# Altium PCB Fan_control.PcbDoc (part 1 of 2)
Units mm, origin at the board's own origin, x right, y up, seen from the top; angles counter-clockwise.
Board outline 271 x 20 mm, 2 copper layers (Top Layer, Bottom Layer), stack 1.571 mm thick; 115 components, 80 nets, 358 pads, 372 vias.
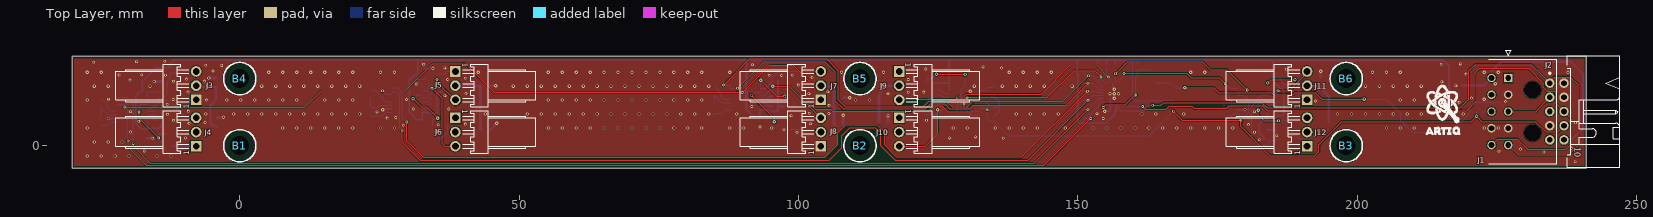
[diagram p0: Top Layer view]
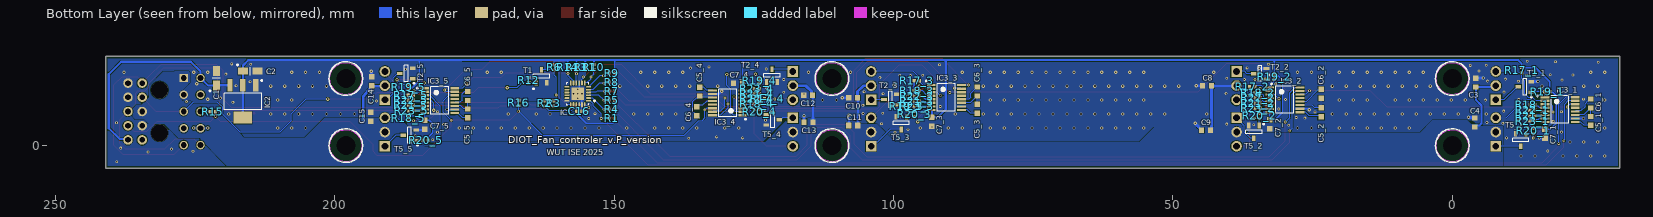
[diagram p1: Bottom Layer view, seen from below]
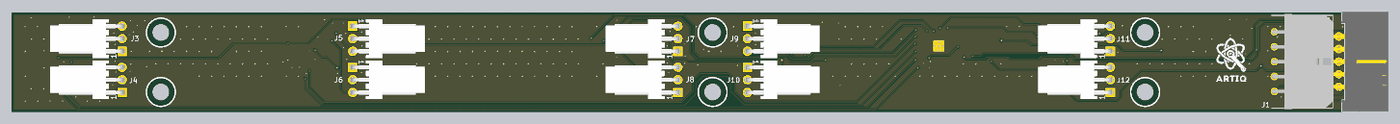
[diagram p3: 3D render of the assembled board from above, using the file's embedded part models]
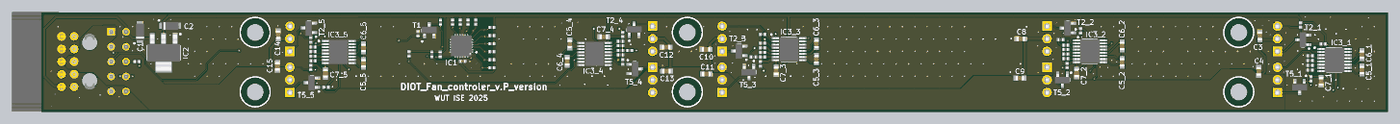
[diagram p4: 3D render of the assembled board from below, using the file's embedded part models]

## Layer stack, top to bottom
Top Solder: solder mask 0.0102, Solder Resist, Dk 3.5
Top Layer: signal copper 0.0356
Dielectric 1: dielectric 1.5, FR-4, Dk 4.8
Bottom Layer: signal copper 0.0356
Bottom Solder: solder mask 0.0102, Solder Resist, Dk 3.5

## Board outline
-30,-4 241,-4 241,16 -30,16

## Design rules (kind name [scope] priority, off if disabled: settings)
BoardOutlineClearance [OnLayer('Top Layer')] p1: gap=0.4 ignorepadtopadclearanceinfootprint=FALSE except(0.1: Text-OutlineEdge Text-CavityEdge Text-CutoutEdge Text-SplitBarrior Text-SplitContinuation)
BoardOutlineClearance BoardOutlineClearance_2 [OnLayer('Multi-Layer')] p2: gap=0.35 ignorepadtopadclearanceinfootprint=FALSE
BoardOutlineClearance BoardOutlineClearance_1 [OnLayer('Bottom Layer')] p3: gap=0.4 ignorepadtopadclearanceinfootprint=FALSE except(0.1: Text-OutlineEdge Text-CavityEdge Text-CutoutEdge Text-SplitBarrior Text-SplitContinuation)
Clearance [All] p1: gap=0.152 ignorepadtopadclearanceinfootprint=TRUE
ComponentClearance ComponentClearance_1 [IsFree or InComponent('J1') vs InComponent('J*')] p1: gap=-1 collisioncheckmode=3 verticalgap=-1 showdistances=TRUE
ComponentClearance [All] p2: gap=0 collisioncheckmode=3 verticalgap=0.254 showdistances=TRUE
HoleSize [All] p1: absolutevalues=TRUE maxlimit=3.4 minlimit=0.025 maxpercent=80.000 minpercent=20.000
MinimumSolderMaskSliver [All] p1: minsoldermaskwidth=0.025
PlaneClearance [All] p1: clearance=0.381
PlaneConnect [InNet('GND')] p1: planeconnectstyle=Relief reliefexpansion=0.508 reliefentries=4 reliefconductorwidth=0.254 reliefairgap=0.254
PolygonConnect [All] p1: connectstyle=Direct reliefconductorwidth=0.254 reliefentries=4 polygonreliefangle="90 Angle" airgapwidth=0.152
RoutingVias [All] p1: holewidth=0.25 width=0.6 viastyle="Through Hole" minholewidth=0.2 minwidth=0.5 maxholewidth=0.7 maxwidth=1.27
SilkToSilkClearance [All] p1: silktosilkclearance=0.076
SilkToSolderMaskClearance [All] p1: minsilkscreentomaskgap=0.025 clearancetoexposedcopper=TRUE
SolderMaskExpansion SolderMaskExpansion_Via [IsVia] p1: expansion=0.015 istentingtop=TRUE
SolderMaskExpansion [All] p2: expansion=0.015 istentingtop=FALSE
SupplyNets "Schematic Supply Nets_3" [InNet('P12V0')] p1: voltage=0.000
SupplyNets "Schematic Supply Nets_2" [InNet('P3V3')] p2: voltage=0.000
SupplyNets "Schematic Supply Nets_1" [InNet('GND')] p3: voltage=0.000
SupplyNets "Schematic Supply Nets" [InNet('P5V0')] p4: voltage=0.000
UnRoutedNet [All] p1: checkbadconnections=TRUE
Width [All] p1: maxlimit=0.508 minlimit=0.152 preferedwidth=0.254
22 further rules are at their usual default settings.

## Classes and differential pairs
channel class channel: channel_1 channel_2 channel_3 channel_4 channel_5
net class FAN: PWM1_1 PWM1_2 PWM1_3 PWM1_4 PWM1_5 PWM2_1 PWM2_2 PWM2_3 PWM2_4 PWM2_5
component class Fan_control: B1 B2 B3 B4 B5 B6 C1 C2 C3 C4 C8 C9 C10 C11 C12 C13 C14 C15 C16 IC1 IC2 J1 J2 J3 J4 J5 J6 J7 J8 J9 J10 J11 J12 R1 R2 R3 R4 R5 R6 R7 R8 R9 R10 R11 R12 R13 R14 R15 R16 T1
component class channel_5: C5_5 C6_5 C7_5 IC3_5 R17_5 R18_5 R19_5 R20_5 R21_5 R22_5 R23_5 T2_5 T5_5
component class channel_4: C5_4 C6_4 C7_4 IC3_4 R17_4 R18_4 R19_4 R20_4 R21_4 R22_4 R23_4 T2_4 T5_4
component class channel_3: C5_3 C6_3 C7_3 IC3_3 R17_3 R18_3 R19_3 R20_3 R21_3 R22_3 R23_3 T2_3 T5_3
component class channel_2: C5_2 C6_2 C7_2 IC3_2 R17_2 R18_2 R19_2 R20_2 R21_2 R22_2 R23_2 T2_2 T5_2
component class channel_1: C5_1 C6_1 C7_1 IC3_1 R17_1 R18_1 R19_1 R20_1 R21_1 R22_1 R23_1 T2_1 T5_1

## Components (designator, comment, footprint, x,y, rotation, side; value= is the part's Value field where it differs from the comment)
B1 "NON-PLATED_3.4" MTG340 0,0 r0 top locked
B2 "NON-PLATED_3.4" MTG340 111,0 r0 top locked
B3 "NON-PLATED_3.4" MTG340 198,0 r0 top locked
B4 "NON-PLATED_3.4" MTG340 0,12 r0 top locked
B5 "NON-PLATED_3.4" MTG340 111,12 r0 top locked
B6 "NON-PLATED_3.4" MTG340 198,12 r0 top locked
C1 "10uF" CAPMP3216X180N 221.175,12.1 r90 bottom
C2 "10uF" CAPMP3216X180N 215.107,13.335 r180 bottom
C3 "1uF" CAPC1608X87N -4.222,11.303 r270 bottom
C4 "1uF" CAPC1608X87N -4.018,4.153 r270 bottom
C5_1 "2.2nF" CAPC1608X87N -24.777,4.444 r90 bottom (schematic designator C5)
C5_2 "2.2nF" CAPC1608X87N 23.485,5.98 r90 bottom (schematic designator C5)
C5_3 "2.2nF" CAPC1608X87N 85.023,6.603 r90 bottom (schematic designator C5)
C5_4 "2.2nF" CAPC1608X87N 134.673,9.684 r270 bottom (schematic designator C5)
C5_5 "2.2nF" CAPC1608X87N 176.186,5.789 r90 bottom (schematic designator C5)
C6_1 "2.2nF" CAPC1608X87N -24.777,7.555 r270 bottom (schematic designator C6)
C6_2 "2.2nF" CAPC1608X87N 23.483,9.307 r270 bottom (schematic designator C6)
C6_3 "2.2nF" CAPC1608X87N 85.023,9.714 r270 bottom (schematic designator C6)
C6_4 "2.2nF" CAPC1608X87N 135.192,6.184 r270 bottom (schematic designator C6)
C6_5 "2.2nF" CAPC1608X87N 176.178,8.901 r270 bottom (schematic designator C6)
C7_1 "100nF" CAPC1608X87N -16.589,2.155 r90 bottom (schematic designator C7)
C7_2 "100nF" CAPC1608X87N 32.65,3.85 r90 bottom (schematic designator C7)
C7_3 "100nF" CAPC1608X87N 93.125,4.3 r90 bottom (schematic designator C7)
C7_4 "100nF" CAPC1608X87N 127.811,11.151 r180 bottom (schematic designator C7)
C7_5 "100nF" CAPC1608X87N 183.85,3.75 r90 bottom (schematic designator C7)
C8 "1uF" CAPC1608X87N 43.886,10.719 r180 bottom
C9 "1uF" CAPC1608X87N 44.064,2.794 r180 bottom
C10 "1uF" CAPC1608X87N 107.225,8.6 r180 bottom
C11 "1uF" CAPC1608X87N 107.175,3.625 r180 bottom
C12 "1uF" CAPC1608X87N 115.275,9.025 r180 bottom
C13 "1uF" CAPC1608X87N 115.202,4.192 r180 bottom
C14 "1uF" CAPC1608X87N 193.375,11.525 r270 bottom
C15 "1uF" CAPC1608X87N 193.525,5.175 r270 bottom
C16 "100nF" CAPC1005X55N 156.211,6.198 r0 bottom
IC1 "TCA9548ARGER" QFN50P400X400X100-25N-S220 156.496,9.284 r0 bottom
IC2 "LM1117MP-3.3/NOPB" SOT230P700X180-4N 216.428,7.925 r270 bottom
IC3_1 "MAX6639AEE+" SOP63P600X175-16N -19.275,6.468 r180 bottom (schematic designator IC3)
IC3_2 "MAX6639AEE+" SOP63P600X175-16N 29.95,8.22 r180 bottom (schematic designator IC3)
IC3_3 "MAX6639AEE+" SOP63P600X175-16N 90.525,8.627 r180 bottom (schematic designator IC3)
IC3_4 "MAX6639AEE+" SOP63P600X175-16N 129.673,7.682 r0 bottom (schematic designator IC3)
IC3_5 "MAX6639AEE+" SOP63P600X175-16N 181.198,8.068 r180 bottom (schematic designator IC3)
J1 "43045-1000" 43045-1000 227,6.122 r90 top
J2 "Header 10" 3M_N2510-5002RB 235.707,6.122 r270 top
J3 "KK®" MOLEX_22-05-7038 -7.8,10.75 r90 top locked
J4 "KK®" MOLEX_22-05-7038 -7.8,2.45 r90 top locked
J5 "KK®" MOLEX_22-05-7038 38.6,10.75 r270 top locked
J6 "KK®" MOLEX_22-05-7038 38.6,2.45 r270 top locked
J7 "KK®" MOLEX_22-05-7038 104,10.75 r90 top locked
J8 "KK®" MOLEX_22-05-7038 104,2.45 r90 top locked
J9 "KK®" MOLEX_22-05-7038 118,10.75 r270 top locked
J10 "KK®" MOLEX_22-05-7038 118,2.45 r270 top locked
J11 "KK®" MOLEX_22-05-7038 191,10.75 r90 top locked
J12 "KK®" MOLEX_22-05-7038 191,2.45 r90 top locked
R1 "10k" RESC1005X40N 150.382,4.878 r180 bottom
R2 "2k2" RESC1005X40N 162.445,7.57 r90 bottom
R3 "2k2" RESC1005X40N 160.758,7.57 r90 bottom
R4 "10k" RESC1005X40N 150.382,6.503 r180 bottom
R5 "10k" RESC1005X40N 150.382,8.129 r180 bottom
R6 "10k" RESC1005X40N 160.676,14.042 r270 bottom
R7 "10k" RESC1005X40N 150.382,9.754 r180 bottom
R8 "10k" RESC1005X40N 150.382,11.38 r180 bottom
R9 "10k" RESC1005X40N 150.382,13.006 r180 bottom
R10 "10k" RESC1005X40N 153.595,14.087 r90 bottom
R11 "10k" RESC1005X40N 155.153,14.06 r90 bottom
R12 "10k" RESC1005X40N 165.225,11.75 r270 bottom
R13 "10k" RESC1005X40N 156.711,14.06 r90 bottom
R14 "10k" RESC1005X40N 158.268,14.06 r90 bottom
R15 "0" RESC1005X40N 221.806,6.122 r0 bottom
R16 "10k" RESC1005X40N 167.022,7.67 r90 bottom
R17_1 "4k7" RESC1005X40N -12.426,13.513 r90 bottom (schematic designator R17)
R17_2 "4k7" RESC1005X40N 35.837,10.563 r0 bottom (schematic designator R17)
R17_3 "4k7" RESC1005X40N 95.825,11.625 r0 bottom (schematic designator R17)
R17_4 "4k7" RESC1005X40N 122.625,8.4 r0 bottom (schematic designator R17)
R17_5 "4k7" RESC1005X40N 186.35,9.075 r0 bottom (schematic designator R17)
R18_1 "4k7" RESC1005X40N -14.352,7.297 r0 bottom (schematic designator R18)
R18_2 "4k7" RESC1005X40N 34.85,9.45 r0 bottom (schematic designator R18)
R18_3 "4k7" RESC1005X40N 95.85,9.85 r0 bottom (schematic designator R18)
R18_4 "4k7" RESC1005X40N 124.475,7.475 r180 bottom (schematic designator R18)
R18_5 "4k7" RESC1005X40N 186.825,4.92 r90 bottom (schematic designator R18)
R19_1 "4k7" RESC1005X40N -17,9.675 r180 bottom (schematic designator R19)
R19_2 "4k7" RESC1005X40N 31.846,12.319 r90 bottom (schematic designator R19)
R19_3 "4k7" RESC1005X40N 97.728,7.051 r180 bottom (schematic designator R19)
R19_4 "4k7" RESC1005X40N 124,11.625 r270 bottom (schematic designator R19)
R19_5 "4k7" RESC1005X40N 186.825,10.5 r270 bottom (schematic designator R19)
R20_1 "4k7" RESC1005X40N -14.5,2.65 r90 bottom (schematic designator R20)
R20_2 "4k7" RESC1005X40N 34.55,5.325 r90 bottom (schematic designator R20)
R20_3 "4k7" RESC1005X40N 96.3,5.675 r90 bottom (schematic designator R20)
R20_4 "4k7" RESC1005X40N 124.025,6.075 r90 bottom (schematic designator R20)
R20_5 "4k7" RESC1005X40N 183.725,0.975 r180 bottom (schematic designator R20)
R21_1 "4k7" RESC1005X40N -14.35,5.375 r0 bottom (schematic designator R21)
R21_2 "4k7" RESC1005X40N 34.856,7.644 r0 bottom (schematic designator R21)
R21_3 "4k7" RESC1005X40N 95.845,7.975 r0 bottom (schematic designator R21)
R21_4 "4k7" RESC1005X40N 124.475,9.325 r180 bottom (schematic designator R21)
R21_5 "4k7" RESC1005X40N 186.35,7.225 r0 bottom (schematic designator R21)
R22_1 "4k7" RESC1005X40N -14.35,6.325 r0 bottom (schematic designator R22)
R22_2 "4k7" RESC1005X40N 34.856,8.569 r0 bottom (schematic designator R22)
R22_3 "4k7" RESC1005X40N 95.85,8.9 r0 bottom (schematic designator R22)
R22_4 "4k7" RESC1005X40N 124.47,8.4 r180 bottom (schematic designator R22)
R22_5 "4k7" RESC1005X40N 186.35,8.15 r0 bottom (schematic designator R22)
R23_1 "4k7" RESC1005X40N -14.35,4.425 r0 bottom (schematic designator R23)
R23_2 "4k7" RESC1005X40N 34.856,6.719 r0 bottom (schematic designator R23)
R23_3 "4k7" RESC1005X40N 95.85,7.05 r0 bottom (schematic designator R23)
R23_4 "4k7" RESC1005X40N 124.475,10.225 r180 bottom (schematic designator R23)
R23_5 "4k7" RESC1005X40N 186.325,6.3 r0 bottom (schematic designator R23)
T1 "BSH103" SOT95P230X110-3N 162.975,12.425 r90 bottom
T2_1 "BSH108,215" SOT95P230X110-3N -12.98,10.525 r0 bottom (schematic designator T2)
T2_2 "BSH108,215" SOT95P230X110-3N 34.397,12.884 r0 bottom (schematic designator T2)
T2_3 "BSH108,215" SOT95P230X110-3N 100.539,8.274 r0 bottom (schematic designator T2)
T2_4 "BSH108,215" SOT95P230X110-3N 121.725,12.55 r90 bottom (schematic designator T2)
T2_5 "BSH108,215" SOT95P230X110-3N 187.175,12.925 r0 bottom (schematic designator T2)
T5_1 "BSH108,215" SOT95P230X110-3N -12.25,1.025 r270 bottom (schematic designator T5)
T5_2 "BSH108,215" SOT95P230X110-3N 35.5,2.475 r270 bottom (schematic designator T5)
T5_3 "BSH108,215" SOT95P230X110-3N 98.6,4.05 r270 bottom (schematic designator T5)
T5_4 "BSH108,215" SOT95P230X110-3N 121.6,4.65 r180 bottom (schematic designator T5)
T5_5 "BSH108,215" SOT95P230X110-3N 186.575,1.875 r0 bottom (schematic designator T5)

## Footprints (in the part's own frame and the unit in brackets; to place one, negate y for a bottom-side part, rotate by r counter-clockwise, add the part's x,y. Pads: shape width x height; smd on the part's side, far side on the other; paste and mask are expansions set on the pad)
3M_N2510-5002RB [mm] "10 Contacts - Right Angle .100\" x .100\" Low Profile Four-Wall Header"
  round 1.7 hole 1: 1(-5.08,-1.27) 2(-5.08,1.27) 3(-2.54,-1.27) 4(-2.54,1.27) 5(0,-1.27) 6(0,1.27) 7(2.54,-1.27) 8(2.54,1.27) 9(5.08,-1.27) 10(5.08,1.27)
  silkscreen extent -10,-1.42 10.01,11.28, body extent -10,-1.59 10.01,11.27, height 8.64
43045-1000 [mm]
  rect 1.52x1.52 hole 1.02: 1(6,0)
  round 1.52 hole 1.02: 2(3,0) 3(0,0) 4(-3,0) 5(-6,0) 6(6,3) 7(3,3) 8(0,3) 9(-3,3) 10(-6,3)
  round 3 hole 3 unplated: 11(3.84,-4.32) 12(-3.84,-4.32)
  silkscreen extent -9.33,-8.72 11,3.52, body extent -9.57,-8.92 9.57,3.32, height 8.67
CAPC1005X55N [mm] "Capacitor, Non-Polarized, Chip; 1.00mm L X 0.50mm W X 0.70mm H, IPC Medium Density"
  rect 0.62x0.62 smd: 1(-0.45,0) 2(0.45,0)
  body extent -0.52,-0.27 0.53,0.28, height 0.55
CAPC1608X87N [mm] "Chip Capacitor, Body 1.6x0.8mm IPC Medium Density"
  rect 0.95x1 smd: 1(-0.8,0) 2(0.8,0)
  body extent -0.87,-0.47 0.88,0.48, height 0.87
CAPMP3216X180N [mm] "Capacitor, Polarized, Molded  Body 3.2x1.6mm, IPC Medium Density"
  rect 1.8x1.25 smd: 1(-1.3,0) 2(1.3,0)
  silkscreen extent -2.4,-0.7 0,1.25, body extent -1.7,-0.9 1.7,0.9, height 1.6
MOLEX_22-05-7038 [mm] "2.54mm (.100\") Pitch KK® Wire-To-Board Header, Right Angle, With Friction Lock, 3 Circuits"
  rect 1.9x1.9 hole 1.2: 1(-2.54,0)
  round 1.9 hole 1.2: 2(0,-0.005) 3(2.54,0)
  silkscreen extent -3.81,1.3 3.81,14.42, body extent -3.81,-0.32 3.81,14.42, height 5.84
MTG340 [mm]
  round 0.5 hole 3.4 unplated mask+1.35: 1(0,0)
QFN50P400X400X100-25N-S220 [mm] "QFN, 0.50mm Pitch, Square; 24 Pin, 4.00mm L X 4.00mm W X 1.00mm H body (w/thermal tab 2.2 X 2.2mm), IPC Medium Density"
  oval 0.9x0.3 smd: 1(-1.95,1.25) 2(-1.95,0.75) 3(-1.95,0.25) 4(-1.95,-0.25) 5(-1.95,-0.75) 6(-1.95,-1.25) 13(1.95,-1.25) 14(1.95,-0.75) 15(1.95,-0.25) 16(1.95,0.25) 17(1.95,0.75) 18(1.95,1.25)
  oval 0.3x0.9 smd: 7(-1.25,-1.95) 8(-0.75,-1.95) 9(-0.25,-1.95) 10(0.25,-1.95) 11(0.75,-1.95) 12(1.25,-1.95) 19(1.25,1.95) 20(0.75,1.95) 21(0.25,1.95) 22(-0.25,1.95) 23(-0.75,1.95) 24(-1.25,1.95)
  rect 2.2x2.2 smd: 25(0,0)
  silkscreen extent -3.12,-2 2,2, body extent -2.07,-2.07 2.08,2.08, height 1
RESC1005X40N [mm] "Chip Resistor, EIA 0402, Metric 1005, Body 1.0x0.5mm, IPC Medium Density"
  rect 0.58x0.62 smd: 1(-0.47,0) 2(0.47,0)
  body extent -0.52,-0.27 0.53,0.28, height 0.4
SOP63P600X175-16N [mm] "SOP, 0.635mm Pitch; 16 Pin, 3.9mm W X 4.895mm L X 1.75mm H Body, IPC Medium Density"
  rect 1.55x0.4 smd: 1(-2.7,2.223) 2(-2.7,1.588) 3(-2.7,0.953) 4(-2.7,0.318) 5(-2.7,-0.317) 6(-2.7,-0.952) 7(-2.7,-1.587) 8(-2.7,-2.222) 9(2.7,-2.223) 10(2.7,-1.588) 11(2.7,-0.953) 12(2.7,-0.318) 13(2.7,0.317) 14(2.7,0.952) 15(2.7,1.587) 16(2.7,2.222)
  silkscreen extent -4.13,-2.45 1.6,2.58, body extent -3.13,-2.49 3.13,2.49, height 1.75
SOT95P230X110-3N [mm] "SOT23, 3 pin, Pitch 0.95mm - 1.3mm W X 2.9mm L X 1.1mm H, IPC Medium Density"
  rect 1x0.6 smd: 1(-1.15,0.95) 2(-1.15,-0.95) 3(1.15,0)
  silkscreen extent -2.35,-1.45 0.33,1.55, body extent -1.08,-1.5 1.25,1.5, height 1.1
SOT230P700X180-4N [mm] "SOT223, 2.30mm pitch; 3 pin, 3.70mm W X 6.70mm L, IPC Medium Density"
  rect 2.15x0.95 smd: 1(-2.9,2.3) 2(-2.9,0) 3(-2.9,-2.3)
  rect 2.15x3.25 smd: 4(2.9,0)
  silkscreen extent -3.87,-3.35 1.45,3.47, body extent -3.65,-3.35 3.65,3.35, height 1.81

## Part data
B1 B2 B3 B4 B5 B6: library part CMP-00028-00013-2, "Non Plated hole with diameter 3.4MM for screw M3"
C1 C2: library part CTE3216-18_10UF_16V_20%_AVX_TCJ, "Polarised capacitor", Case=A, Manufacturer=AVX, Manufacturer Part Number=TCJA106M016R0200, Tolerance=±20%, Voltage=16V, Author="CERN DEM JLC", Component Type=Standard, ComponentHeight=1.8mm, CreateDate=29.03.2012, HelpURL=\\cern.ch\dfs\Applications\Altium\Datasheets\CTE_AVX_TCJ.pdf, LatestRevisionDate=29.03.2012, Mounted=Yes, Part Description="ESR 0R200 Tantalum Solid Electrolytic Chip Capacitor with Conductive Polymer Electrode", Part Number=CTE3216-18_10UF_16V_20%_AVX_TCJ, Pin Count=2, Sense=No, SMD=Yes, Socket=No, Status=Preferred
C3 C4 C8 C9 C10 C11 C12 C13 C14 C15: library part CC0603_1UF_16V_10%_X7R, "Non-polarised capacitor", Case=0603, Manufacturer=GENERIC, Manufacturer1 ComponentHeight=0.9mm, Manufacturer1 Example="YAGEO PHYCOMP", Manufacturer1 Part Number=223878615663, Tolerance=±10%, Voltage=16V, Author="CERN DEM JLC", Component Type=Standard, CreateDate=03.12.2007, HelpURL=\\cern.ch\dfs\Applications\Altium\Datasheets\CC0603_X7R_PHYCOMP.pdf, LatestRevisionDate=17.04.2015, Manufacturer Part Number=CC0603_1UF_16V_10%_X7R, Mounted=Yes, Part Description="SMD Multilayer Chip Ceramic Capacitor", Part Number=CC0603_1UF_16V_10%_X7R, Pin Count=2, Sense=No, SMD=Yes, Socket=No, Status=None, TC=X7R
C5_1 C5_2 C5_3 C5_4 C5_5 C6_1 C6_2 C6_3 C6_4 C6_5: library part CC0603_2.2NF_50V_10%_X7R, "Non-polarised capacitor", Case=0603, Manufacturer=GENERIC, Manufacturer1 ComponentHeight=0.87mm, Manufacturer1 Example=PHYCOMP, Manufacturer1 Part Number=223858615627, Tolerance=±10%, Voltage=50V, Author="CERN DEM JLC", Component Type=Standard, CreateDate=03.12.2007, HelpURL=\\cern.ch\dfs\Applications\Altium\Datasheets\CC0603_X7R_PHYCOMP.pdf, LatestRevisionDate=03.12.2007, Manufacturer Part Number=CC0603_2.2NF_50V_10%_X7R, Mounted=Yes, Part Description="SMD Multilayer Chip Ceramic Capacitor", Part Number=CC0603_2.2NF_50V_10%_X7R, Pin Count=2, Sense=No, SMD=Yes, Socket=No, Status=Preferred, TC=X7R
C7_1 C7_2 C7_3 C7_4 C7_5: library part CC0603_100NF_50V_10%_X5R, "Non-polarised capacitor", Case=0603, Manufacturer=GENERIC, Manufacturer1 ComponentHeight=0.9mm, Manufacturer1 Example=TDK, Manufacturer1 Part Number=C1608X5R1H104K080, Tolerance=±10%, Voltage=50V, Author="CERN DEM MR", Component Type=Standard, CreateDate=08.01.2016, HelpURL=\\cern.ch\dfs\Applications\Altium\Datasheets\CC0603_X5R_TDK_C.pdf, LatestRevisionDate=08.01.2016, Manufacturer Part Number=CC0603_100NF_50V_10%_X5R, Mounted=Yes, Part Description="SMD Multilayer Chip Ceramic Capacitor", Part Number=CC0603_100NF_50V_10%_X5R, Pin Count=2, Sense=No, SMD=Yes, Socket=No, Status=None, TC=X5R
C16: library part CC0402_100NF_16V_10%_X7R, "Non-polarised capacitor", Case=0402, Manufacturer=GENERIC, Manufacturer1 ComponentHeight=0.55mm, Manufacturer1 Example=MURATA, Manufacturer1 Part Number=GRM155R71C104KA88D, Tolerance=±10%, Voltage=16V, Author="CERN DEM JLC", Component Type=Standard, CreateDate=05/12/2013, HelpURL=\\cern.ch\dfs\Applications\Altium\Datasheets\CC0402_X7R_MURATA_GRM.pdf, LatestRevisionDate=03/12/2007, Manufacturer Part Number=CC0402_100NF_16V_10%_X7R, Mounted=Yes, Part Description="SMD Multilayer Chip Ceramic Capacitor", Part Number=CC0402_100NF_16V_10%_X7R, Pin Count=2, Sense=No, SMD=Yes, Socket=No, Status="Not Recommended", TC=X7R
IC1: "Low Voltage 8-Channel I2C Switch With Reset", Case=QFN24, Manufacturer="TEXAS INSTRUMENTS", Author="CERN DEM JLC", Bonding=No, Component Type=Standard, ComponentHeight=1mm, CreateDate=07.07.2014, Device=TCA9548ARGER, HelpURL=\\cern.ch\dfs\Applications\Altium\Datasheets\TCA9548ARGER.pdf, LatestRevisionDate=07.07.2014, Manufacturer Part Number=TCA9548ARGER, Mounted=Yes, PackageDescription="QFN, 0.50mm Pitch, Square; 24 Pin, 4.00mm L X 4.00mm W X 1.00mm H body (w/thermal tab 2.2 X 2.2mm), IPC Medium Density", Part Description="Low Voltage 8-Channel I2C Switch With Reset", Part Number=TCA9548ARGER, Pin Count=25, PressFit=No, Sense=No, SMD=Yes, Socket=No
IC2: "3-Terminal Regulator 1=GND 2=OUT 3=IN 4=OUT", Device=LM1117MP-3.3/NOPB, Part Number=LM1117MP-3.3/NOPB
IC3_1 IC3_2 IC3_3 IC3_4 IC3_5: "2-Channel Temperature Monitor with Dual, Automatic, PWM Fan-Speed Controller", Case=SSOP16, Manufacturer=MAXIM, Manufacturer Part Number=MAX6639AEE, Author="CERN DEM JLC", Bonding=No, Component Type=Standard, ComponentHeight=1.75mm, CreateDate=15.08.2012, Device=MAX6639AEE+, HelpURL=\\cern.ch\dfs\Applications\Altium\Datasheets\MAX6639AEE+.pdf, LatestRevisionDate=04.04.2022, Mounted=Yes, PackageDescription="SOP, 0.635mm Pitch; 16 Pin, 3.9mm W X 4.895mm L X 1.75mm H body, IPC Medium Density", Part Description="2-Channel Temperature Monitor with Dual, Automatic, PWM Fan-Speed Controller", Part Number=MAX6639AEE+, Pin Count=16, PressFit=No, Sense=No, SMD=Yes, Socket=No
J1: library part CMP-002-04656-3, "Rectangular Power Connector, 10 Contact(s), Male, Solder Terminal, Receptacle", Max Operating Temperature=105°C, Min Operating Temperature=-40°C, Connector Type=Power,Rectangular, Mounting Technology=Board, RoHS Compliant=Yes
J2: library part 3M_N2510-5002RB, "Connector 10 Male", Manufacturer=3M, Manufacturer Part Number=N2510-5002RB, Author="CERN DEM JLC", Component Type=Standard, ComponentHeight=8.59mm, CreateDate=29.10.2008, Family="Header 10", HelpURL=\\cern.ch\dfs\Applications\Altium\Datasheets\3M_N2510-5002RB.pdf, LatestRevisionDate=27.10.2022, Mounted=Yes, Part Description="10 Contacts, Right Angle .100\" x .100\" Low Profile Four-Wall Header, (Solder Tail 2.84mm), 2500 Series", Part Number=3M_N2510-5002RB, Pin Count=10, PressFit=No, Sense=No, SMD=No, Socket=No, Status=None
J3 J4 J5 J6 J7 J8 J9 J10 J11 J12: library part MOLEX_22-05-7038, "Connector 3 Male", Manufacturer=MOLEX, Manufacturer Part Number=22-05-7038, Author="CERN DEM JLC", Component Type=Standard, ComponentHeight=5.8mm, CreateDate=19.09.2012, Family=KK®, HelpURL=\\cern.ch\dfs\Applications\Altium\Datasheets\MOLEX_22-05-7038.pdf, LatestRevisionDate=19.09.2012, Mounted=Yes, Part Description="2.54mm (.100\") Pitch KK® Wire-To-Board Header, Right Angle, with Friction Lock, 3 Circuits", Part Number=MOLEX_22-05-7038, Pin Count=3, PressFit=No, Sense=No, SMD=No, Socket=No, Status=None
R1 R4 R5 R6 R7 R8 R9 R10 R11 R12 R13 R14 R16: library part R0402_10K_1%_0.0625W_100PPM, "Resistor - 1%", Case=0402, Manufacturer=GENERIC, Manufacturer1 ComponentHeight=0.4mm, Manufacturer1 Example="YAGEO PHYCOMP", Manufacturer1 Part Number=232270671003L, Power=0.0625W, Tolerance=±1%, Author="CERN DEM JLC", Component Type=Standard, CreateDate=03.12.2007, HelpURL=\\cern.ch\dfs\Applications\Altium\Datasheets\R0402_Phycomp_RC0402.pdf, LatestRevisionDate=17.10.2012, Manufacturer Part Number=R0402_10K_1%_0.0625W_100PPM, Mounted=Yes, Part Description="General Purpose Thick Film Chip Resistor", Part Number=R0402_10K_1%_0.0625W_100PPM, Pin Count=2, PressFit=No, Sense=No, SMD=Yes, Socket=No, Status="Not Recommended", TC=±100ppm/°C
R2 R3: library part R0402_2K2_1%_0.0625W_100PPM, "Resistor - 1%", Case=0402, Manufacturer=GENERIC, Manufacturer1 ComponentHeight=0.4mm, Manufacturer1 Example="YAGEO PHYCOMP", Manufacturer1 Part Number=232270672202L, Power=0.0625W, Tolerance=±1%, Author="CERN DEM JLC", Component Type=Standard, CreateDate=03.12.2007, HelpURL=\\cern.ch\dfs\Applications\Altium\Datasheets\R0402_Phycomp_RC0402.pdf, LatestRevisionDate=17.10.2012, Manufacturer Part Number=R0402_2K2_1%_0.0625W_100PPM, Mounted=Yes, Part Description="General Purpose Thick Film Chip Resistor", Part Number=R0402_2K2_1%_0.0625W_100PPM, Pin Count=2, PressFit=No, Sense=No, SMD=Yes, Socket=No, Status="Not Recommended", TC=±100ppm/°C
R15: library part R0402_0R_JUMPER, "Resistor", Case=0402, Manufacturer=GENERIC, Manufacturer1 ComponentHeight=0.4mm, Manufacturer1 Example="YAGEO PHYCOMP", Manufacturer1 Part Number=232270591001L, Author="CERN DEM JLC", Component Type=Standard, CreateDate=03.12.2007, HelpURL=\\cern.ch\dfs\Applications\Altium\Datasheets\R0402_Phycomp_RC0402.pdf, LatestRevisionDate=17.10.2012, Manufacturer Part Number=R0402_0R_JUMPER, Mounted=Yes, Part Description="1A (0.05R Max DC Resistance) Zero Ohm Jumper", Part Number=R0402_0R_JUMPER, Pin Count=2, PressFit=No, Sense=No, SMD=Yes, Socket=No, Status="Not Recommended"
R17_1 R17_2 R17_3 R17_4 R17_5 R18_1 R18_2 R18_3 R18_4 R18_5 R19_1 R19_2 R19_3 R19_4 R19_5 R20_1 R20_2 R20_3 R20_4 R20_5 R21_1 R21_2 R21_3 R21_4 R21_5 R22_1 R22_2 R22_3 R22_4 R22_5 R23_1 R23_2 R23_3 R23_4 R23_5: library part R0402_4K7_1%_0.0625W_100PPM, "Resistor - 1%", Case=0402, Manufacturer=GENERIC, Manufacturer1 ComponentHeight=0.4mm, Manufacturer1 Example="YAGEO PHYCOMP", Manufacturer1 Part Number=232270674702L, Power=0.0625W, Tolerance=±1%, Author="CERN DEM JLC", Component Type=Standard, CreateDate=03.12.2007, HelpURL=\\cern.ch\dfs\Applications\Altium\Datasheets\R0402_Phycomp_RC0402.pdf, LatestRevisionDate=17.10.2012, Manufacturer Part Number=R0402_4K7_1%_0.0625W_100PPM, Mounted=Yes, Part Description="General Purpose Thick Film Chip Resistor", Part Number=R0402_4K7_1%_0.0625W_100PPM, Pin Count=2, PressFit=No, Sense=No, SMD=Yes, Socket=No, Status="Not Recommended", TC=±100ppm/°C
T1: "N-CHANNEL MOSFET WITH DIODE", Case=SOT23-3, Manufacturer=NEXPERIA, Author="CERN DEM JLC", Bonding=No, ClassName=Artix, Component Type=Standard, ComponentHeight=1.1mm, CreateDate=16.03.2010, Device=BSH103, HelpURL=\\cern.ch\dfs\Applications\Altium\Datasheets\BSH103.pdf, LatestRevisionDate=20.06.2017, Manufacturer Part Number=BSH103, Mounted=Yes, PackageDescription="SOT23, 3 pin, Pitch 0.95mm - 1.3mm W X 2.9mm L X 1.1mm H, IPC Medium Density", Part Description="30V 850mA N-Channel Enhancement Mode Field-Effect Transistor", Part Number=BSH103, Pin Count=3, PressFit=No, Sense=No, SMD=Yes, Socket=No
T2_1 T2_2 T2_3 T2_4 T2_5 T5_1 T5_2 T5_3 T5_4 T5_5: library part BSH108, "MOSFET N-CH 30V 1.9A TO236AB", Device=BSH108,215, Part Number=BSH108,215

## Via types
v1: diameter 0.6, hole 0.3, Top Layer to Bottom Layer, tented both sides, 239 vias
v2: diameter 0.5, hole 0.25, Top Layer to Bottom Layer, tented both sides, 88 vias
v3: diameter 0.5, hole 0.2, Top Layer to Bottom Layer, tented both sides, 45 vias

## Nets (pads, with @x,y where several pads share a name; then routed paths per layer and width w, separated by ;. In a path a pad name is that pad's centre, name@x,y a point inside that pad or via, vN(x,y) a via of type N, cw(c..) or ccw(c..) an arc to the next point about the centre after c; other vN are vias at no path point)
ALERT_n: IC3_1.14 IC3_2.14 IC3_3.14 IC3_4.14 IC3_5.14 J2.8 R15.1 R16.1 | length 301
  Top Layer w0.152: v3(-20.571,6.915) -20.514,6.858 11.679,6.858 14.651,9.83 v3(25.573,9.83) 29.655,9.83 34.504,14.679 40.409,14.679 45.537,9.55 v3(89.92,9.55) 90.014,9.55 94.889,14.425 99.032,14.425 102.425,11.032 102.425,7.075 102.95,6.55 105.75,6.55 106.11,6.19 123.333,6.19 124.322,7.179 125.612,7.179 126.668,6.122 131.19,6.122 131.494,6.427 v3(133.755,6.427) ; v3(167.069,6.181) 168.675,4.575 v3(179.15,4.575) 179.125,4.55 179.125,3.45 184.325,-1.75 192.375,-1.75 193.1,-1.025 193.1,0.218 197.175,4.293 220.346,4.293 v1(221.323,5.271) 222.301,4.293 231.871,4.293 233.7,2.464 235.859,2.464 J2.8@236.977,3.582
  Bottom Layer w0.152: IC3_1.14@-21.975,7.42 -21.967,7.412 -21.057,7.412 -20.571,6.927 v3(-20.571,6.915) ; v3(25.573,9.83) 26.23,9.173 IC3_2.14@27.25,9.173 ; IC3_3.14@87.825,9.579 89.891,9.579 v3(89.92,9.55) ; IC3_4.14@132.373,6.73 133.381,6.73 133.684,6.427 v3(133.755,6.427) 133.755,5.02 134.35,4.425 134.95,4.425 137.55,1.825 162.714,1.825 v3(167.069,6.181) 167.069,7.2 R16.1@167.022,7.2 ; IC3_5.14@178.498,9.02 179.56,9.02 180.528,8.052 180.528,5.953 v3(179.15,4.575) ; v1(221.323,5.271) R15.1@221.323,6.075
GND: C1.2 C2.2 C3.1 C4.1 C7_1.1 C7_2.1 C7_3.1 C7_4.1 C7_5.1 C8.1 C9.1 C10.1 C11.1 C12.1 C13.1 C14.1 C15.1 C16.1 IC1.9 IC1.18 IC1.22 IC1.23 IC1.25 IC2.1 IC3_1.10 IC3_2.10 IC3_3.10 IC3_4.10 IC3_5.10 J1.2 J1.4 J1.9 J2.2 J2.4 J2.7 R12.1 T1.2 T2_1.2 T2_2.2 T2_3.2 T2_4.2 T2_5.2 T5_1.2 T5_2.2 T5_3.2 T5_4.2 T5_5.2 | length 27.3
  Top Layer w0.508: 214.404,5.817 214.422,5.817
  Bottom Layer w0.254: C3.1@-4.222,12.103 C3.1@-4.205,12.12 ; v1(25.579,6.427) 25.673,6.427 25.877,6.631 IC3_2.10@27.25,6.633 IC3_2.10@27.25,6.633 ; IC3_3.10@87.825,7.039 IC3_3.10@87.898,7.112 ; v1(154.789,6.148) 154.839,6.198 C16.1@155.761,6.198 155.754,6.206 IC1.23@155.754,7.316 ; IC1.25@155.746,8.534 IC1.23@155.746,7.334 155.754,7.326 IC1.23@155.754,7.316 ; IC1.22@156.228,7.316 IC1.23@155.754,7.316 ; IC1.25@156.246,10.257 IC1.9@156.246,11.234 ; IC1.25@156.413,10.09 v1(156.49,10.09) ; IC1.18@158.446,8.034 IC1.18@158.455,8.043 ; IC3_5.10@178.498,6.48 v1(179.89,6.48)
  Bottom Layer w0.305: v1(-23.475,4.877) -23.472,4.88 IC3_1.10@-21.975,4.88 IC3_1.10@-21.964,4.891 ; v1(130.725,9.775) 130.725,9.762 131.038,9.449 ; 131.038,9.448 131.217,9.27 IC3_4.10@132.373,9.27 ; C7_5.1@183.85,2.95 183.975,2.825 T5_5.2@185.425,2.825
  Bottom Layer w0.508: C7_1.1@-16.589,1.355 -16.584,1.35 v2(-15.575,1.35) ; v1(-15.322,11.49) -15.314,11.483 -14.138,11.483 T2_1.2@-14.13,11.475 T2_1.2@-14.128,11.477 ; v1(-5.517,12.116) -5.504,12.103 C3.1@-4.222,12.103 ; C4.1@-4.018,4.953 -3.941,5.031 -3.019,5.031 -2.925,5.125 v1(-2.9,5.125) ; T2_2.2@33.247,13.834 33.251,13.839 34.585,13.839 v1(34.59,13.843) ; C8.1@44.686,10.719 44.699,10.732 45.778,10.732 v1(45.791,10.745) ; C9.1@44.864,2.794 44.864,2.819 45.977,3.932 45.977,3.996 v1(45.994,4.014) ; C7_3.1@93.125,3.5 C7_3.1@93.15,3.475 ; C11.1@107.961,3.577 107.961,5.386 108,5.425 v1(108,5.45) ; C10.1@108.025,8.6 v1(109.15,8.6) ; v1(116,5.375) 116.002,5.373 C13.1@116.002,4.192 ; C14.1@193.375,12.325 193.407,12.357 193.407,13.307 v1(193.425,13.325)
  other v1: -27.3,-1.825 -24.8,-1.825 -22.3,-1.825 -19.8,-1.825 -14.8,-1.825 -12.3,-1.825 -26.05,0.675 -23.55,0.675 -21.05,0.675 -27.3,3.175 7.7,3.175 10.2,3.175 12.7,3.175 15.2,3.175 17.7,3.175 20.2,3.175 25.2,3.175 27.7,3.175 55.2,3.175 57.7,3.175 60.2,3.175 62.7,3.175 65.2,3.175 67.7,3.175 70.2,3.175 72.7,3.175 75.2,3.175 77.7,3.175 80.2,3.175 82.7,3.175 87.7,3.175 90.2,3.175 95.2,3.175 127.7,3.175 130.2,3.175 135.2,3.175 137.7,3.175 140.2,3.175 142.7,3.175 147.7,3.175 152.7,3.175 155.2,3.175 157.7,3.175 160.2,3.175 162.7,3.175 165.2,3.175 167.7,3.175 170.2,3.175 172.7,3.175 175.2,3.175 177.7,3.175 205.2,3.175 207.7,3.175 210.2,3.175 222.7,3.175 225.2,3.175 -6.05,5.675 -1.05,5.675 1.45,5.675 3.95,5.675 6.45,5.675 8.95,5.675 11.45,5.675 13.95,5.675 16.45,5.675 18.95,5.675 21.45,5.675 43.95,5.675 51.45,5.675 53.95,5.675 56.45,5.675 58.95,5.675 61.45,5.675 63.95,5.675 66.45,5.675 68.95,5.675 71.45,5.675 73.95,5.675 76.45,5.675 78.95,5.675 81.45,5.675 83.95,5.675 88.95,5.675 138.95,5.675 141.45,5.675 143.95,5.675 146.45,5.675 161.45,5.675 163.95,5.675 168.95,5.675 196.45,5.675 198.95,5.675 201.45,5.675 203.95,5.675 206.45,5.675 208.95,5.675 211.45,5.675 218.95,5.675 -27.3,8.175 -2.3,8.175 0.2,8.175 2.7,8.175 5.2,8.175 7.7,8.175 10.2,8.175 15.2,8.175 17.7,8.175 20.2,8.175 55.2,8.175 57.7,8.175 60.2,8.175 62.7,8.175 65.2,8.175 67.7,8.175 70.2,8.175 72.7,8.175 75.2,8.175 77.7,8.175 80.2,8.175 82.7,8.175 110.2,8.175 112.7,8.175 207.7,8.175 210.2,8.175 222.7,8.316 156.516,8.51 156.496,9.284 155.728,9.297 157.252,9.297 -26.05,10.675 -23.55,10.675 -16.05,10.675 3.95,10.675 6.45,10.675 8.95,10.675 11.45,10.675 13.95,10.675 16.45,10.675 18.95,10.675 21.45,10.675 48.95,10.675 51.45,10.675 53.95,10.675 56.45,10.675 58.95,10.675 61.45,10.675 63.95,10.675 66.45,10.675 68.95,10.675 71.45,10.675 73.95,10.675 76.45,10.675 78.95,10.675 81.45,10.675 83.95,10.675 131.45,10.675 136.45,10.675 138.95,10.675 141.45,10.675 143.95,10.675 148.95,10.675 201.45,10.675 203.95,10.675 206.45,10.675 208.95,10.675 211.45,10.675 224.645,11.095 -27.3,13.175 -24.8,13.175 5.2,13.175 7.7,13.175 10.2,13.175 12.7,13.175 15.2,13.175 17.7,13.175 20.2,13.175 25.2,13.175 27.7,13.175 42.7,13.175 55.2,13.175 57.7,13.175 60.2,13.175 62.7,13.175 65.2,13.175 67.7,13.175 70.2,13.175 72.7,13.175 75.2,13.175 77.7,13.175 80.2,13.175 82.7,13.175 87.7,13.175 107.7,13.175 115.2,13.175 137.7,13.175 140.2,13.175 142.7,13.175 145.2,13.175 170.2,13.175 172.7,13.175 202.7,13.175 205.2,13.175 207.7,13.175 222.7,13.175 225.2,13.175 237.7,13.175
  other v2: 239,-2.85 233.375,-1.125 225.35,-1 -17.075,-0.95 229.2,-0.6 238.275,-0.425 182.425,1.075 136.65,1.35 -9.7,1.4 127,1.4 131.65,1.575 99.725,2.425 181.6,2.425 -19.538,2.44 97.4,2.925 29.25,3.675 35.525,3.75 180.525,3.775 40.375,3.875 102.125,3.95 -9.05,4.025 239.028,4.125 -6.2,4.15 -18.043,4.375 -11.825,4.55 122.9,4.575 26.375,4.95 27.925,5.05 98.675,5.35 -12.9,5.625 105.425,5.775 101.9,5.825 24.575,6.05 -19.532,6.067 181.575,6.1 -9.2,6.2 31.05,6.575 37.4,6.575 91.625,7.025 105.475,7.25 -12.975,7.425 218.2,7.775 226.525,7.904 192.5,8 -5.925,8.175 -11.875,8.275 220.425,8.525 36.725,8.95 101.85,9.3 40.475,9.325 119.65,9.575 -9.25,9.6 122.4,9.6 105.25,9.65 217.625,10.725 99.95,10.85 31.6,11.05 215.125,11.45 -11.825,11.525 -6.325,11.575 -19.625,11.75 37.2,11.85 119.625,11.85 -9.5,11.925 40.375,12.075 102.425,12.2 96.975,12.575 -13.275,12.6 98.875,12.6 94.75,12.625 -21.575,12.65 -17.525,12.7 219.45,12.825 -4.775,13.375 122.775,13.725 136.325,13.9 36.725,13.925 133,14.1 -3.225,14.375 -6.075,14.4 91.75,14.475 32.9,14.6 215.025,14.6 218.425,14.65 -26.125,14.95 -18.45,15.025 -13.425,15.125
  other v3: 185.57,1.789 93.106,3.344 154.535,4.852 153.392,5.741 29.846,8.281 -23.5,8.332 115.983,9.29 187.305,13.683
I2C_SCL_0: IC1.2 IC3_1.16 R4.1 | length 191.7
  Top Layer w0.152: v3(-19.04,0.367) -18.994,0.322 -18.994,-0.111 -15.976,-3.129 142.184,-3.129 v3(151.817,6.503)
  Bottom Layer w0.152: IC3_1.16@-21.975,8.69 -20.277,8.69 -19.04,7.453 v3(-19.04,0.367) ; R4.1@150.814,6.554 150.864,6.503 v3(151.817,6.503) 153.847,8.534 IC1.2@154.546,8.534
I2C_SCL_1: IC1.4 IC3_2.16 R7.1 | length 150.3
  Top Layer w0.152: v3(29.891,4.242) 29.891,0.864 32.852,-2.098 104.727,-2.098 107.05,0.225 107.05,2.337 108.45,3.737 114.089,3.737 115.388,2.438 115.388,0.137 117.51,-1.985 139.976,-1.985 v3(151.715,9.754)
  Bottom Layer w0.152: IC3_2.16@27.25,10.443 27.282,10.41 28.165,10.41 29.112,9.463 29.112,5.021 v3(29.891,4.242) ; R7.1@150.877,9.881 150.852,9.856 150.953,9.754 v3(151.715,9.754) 153.011,9.754 153.231,9.534 IC1.4@154.546,9.534
I2C_SCL_2: IC1.6 IC3_3.16 R9.1 | length 83
  Top Layer w0.152: v3(86.58,10.846) 91.257,15.524 105.076,15.524 107.15,13.45 107.15,8.237 108.376,7.012 122.33,7.012 123.293,7.975 126.466,7.975 127.475,6.966 130.216,6.966 131.2,7.95 147.303,7.95 v3(151.873,12.52)
  Bottom Layer w0.152: v3(86.58,10.846) 86.581,10.848 87.824,10.848 IC3_3.16@87.825,10.849 ; R9.1@150.852,13.006 150.852,12.986 151.317,12.52 v3(151.873,12.52) 152.594,12.52 154.298,10.816 154.298,10.602 154.366,10.534 IC1.6@154.546,10.534
I2C_SCL_3: IC1.8 IC3_4.16 R11.1 | length 37.2
  Top Layer w0.152: v3(129.606,7.444) 129.612,7.45 129.612,8.86 129.998,9.246 143.42,9.246 148.625,14.451 153.292,14.451 v3(155.449,12.294)
  Bottom Layer w0.152: v3(129.606,7.444) 129.606,6.797 130.957,5.446 132.36,5.446 IC3_4.16@132.373,5.46 ; R11.1@155.153,13.782 R11.1@155.153,13.59 155.153,12.591 v3(155.449,12.294) 155.449,12.2 155.737,11.912 155.737,11.243 IC1.8@155.746,11.234
I2C_SCL_4: IC1.11 IC3_5.16 R14.1 | length 24.2
  Top Layer w0.152: v3(158.242,12.946) 169.486,12.946 170.273,12.159 175.304,12.159 v3(176.363,11.1)
  Bottom Layer w0.152: IC1.11@157.246,11.234 157.246,11.569 158.179,12.502 158.179,12.884 v3(158.242,12.946) 158.242,13.619 R14.1@158.267,13.645 ; v3(176.363,11.1) 177.173,10.29 IC3_5.16@178.498,10.29